# Altium PCB BaseBoard.PcbDoc
Units mm, origin at the board's own origin, x right, y up, seen from the top; angles counter-clockwise.
Board outline 52.58 x 52.07 mm, 2 copper layers (Top Layer, Bottom Layer); 62 components, 47 nets, 274 pads, 37 vias.
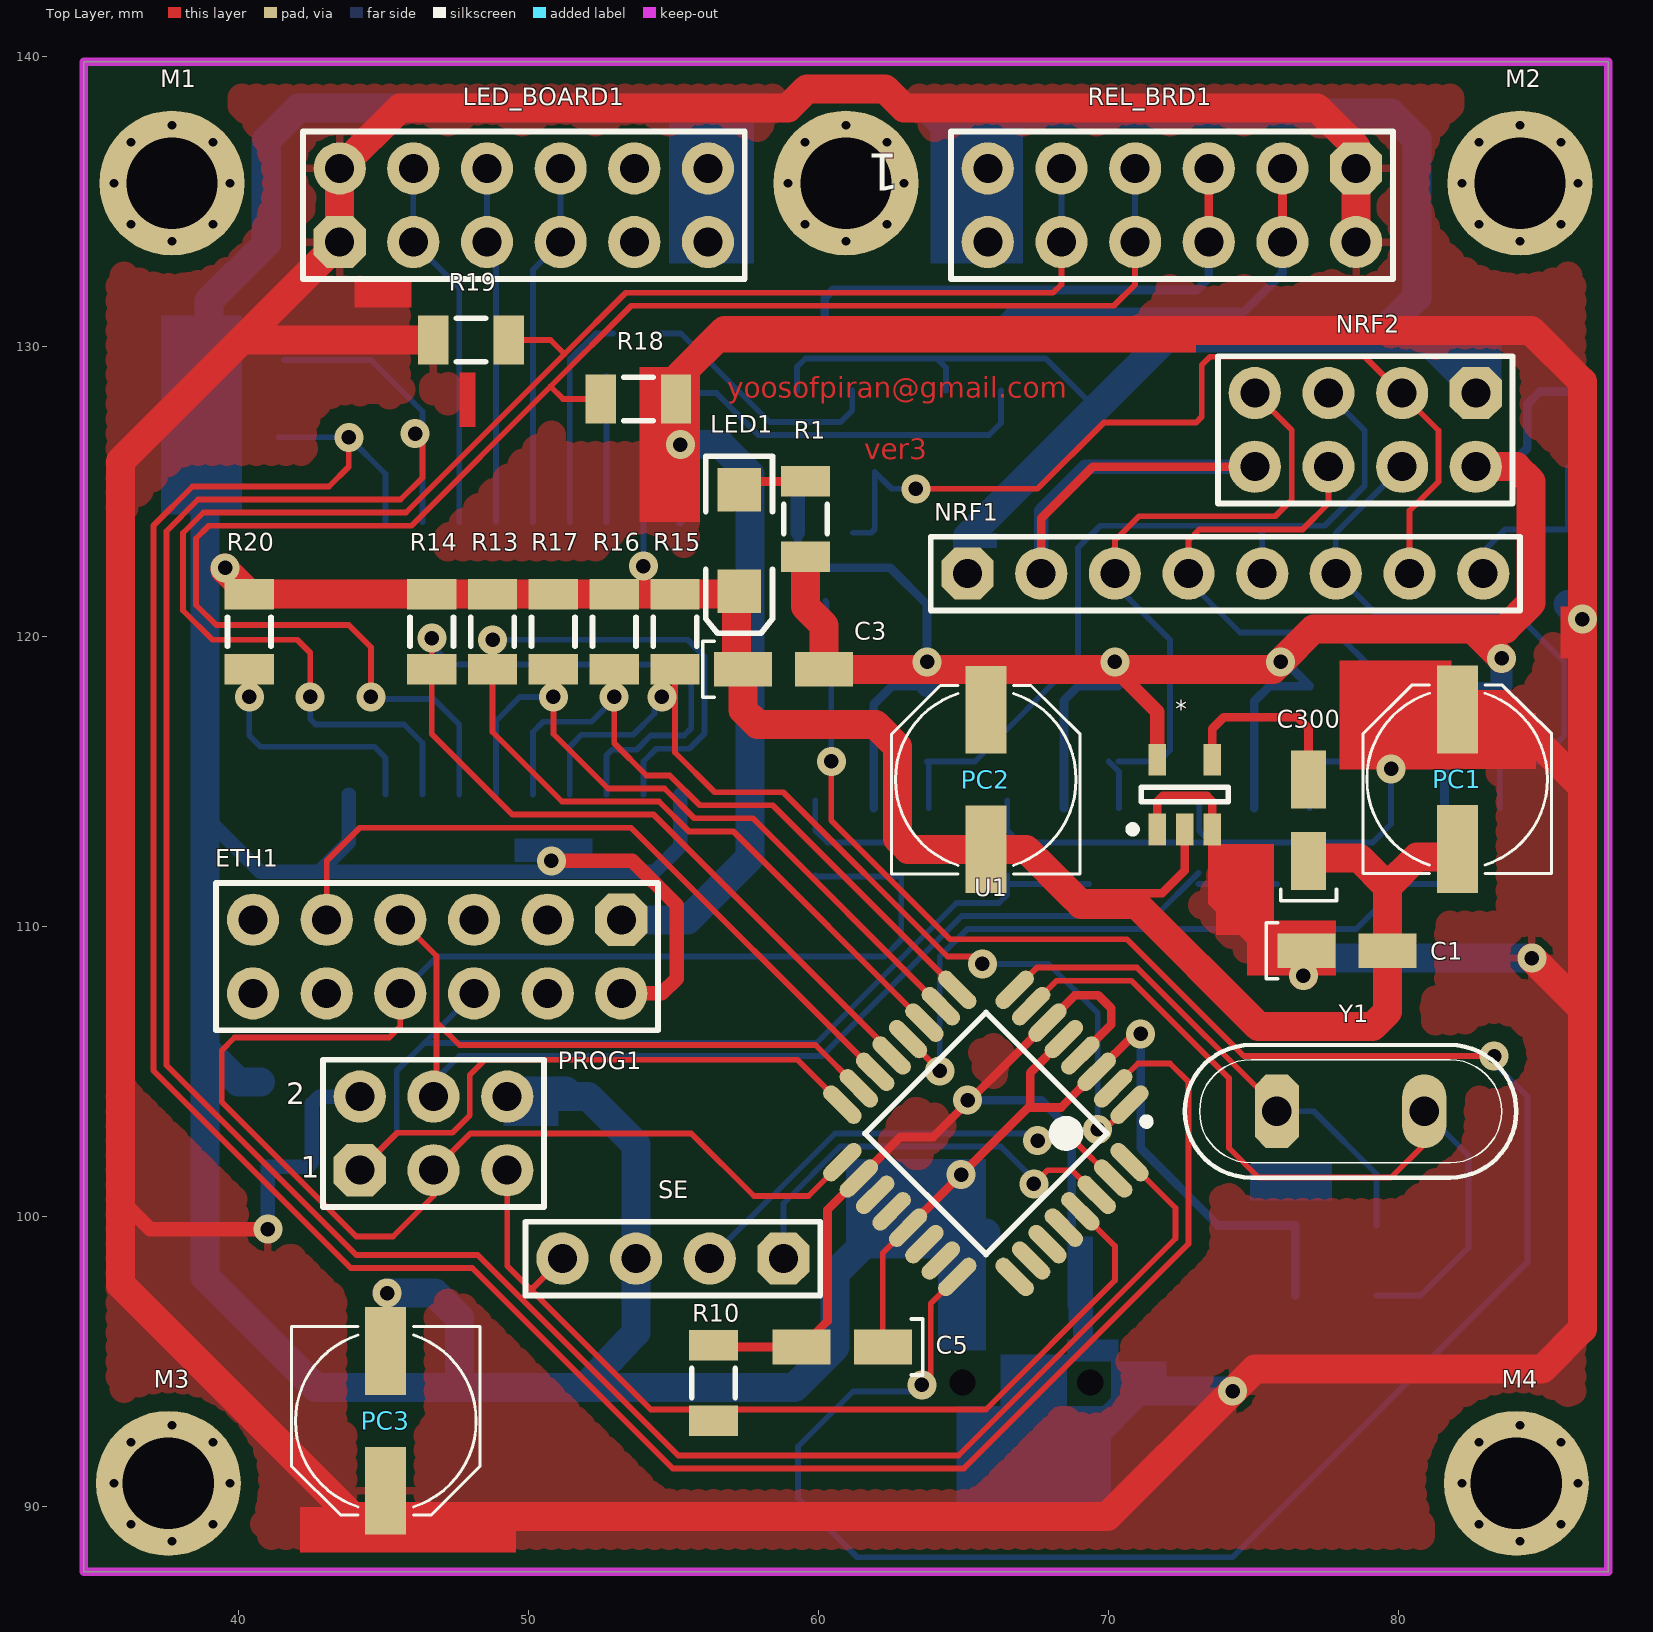
[diagram p0: Top Layer view]
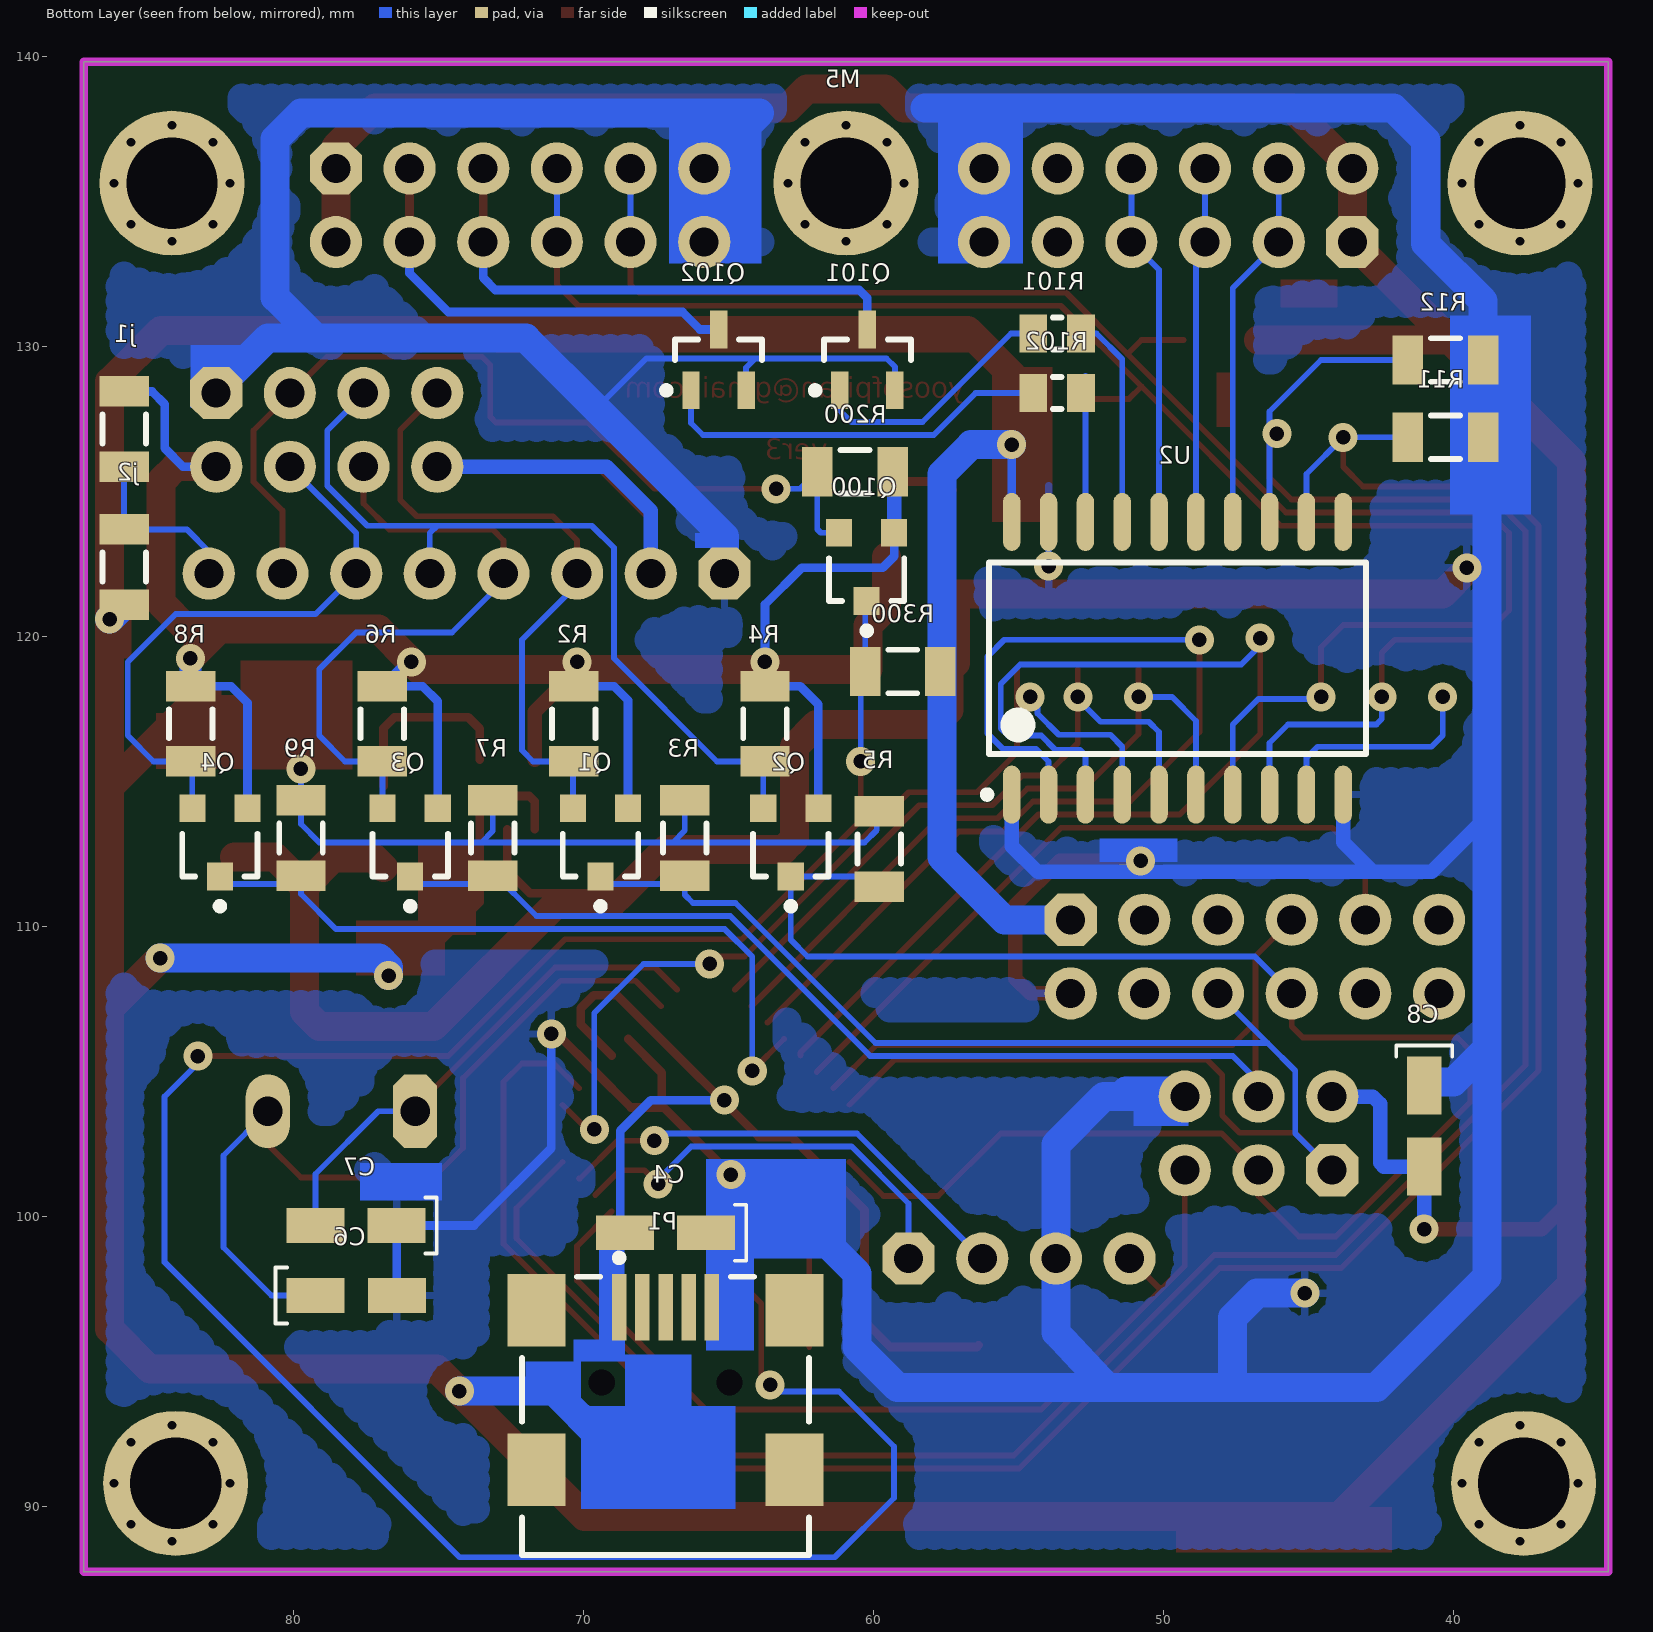
[diagram p1: Bottom Layer view, seen from below]
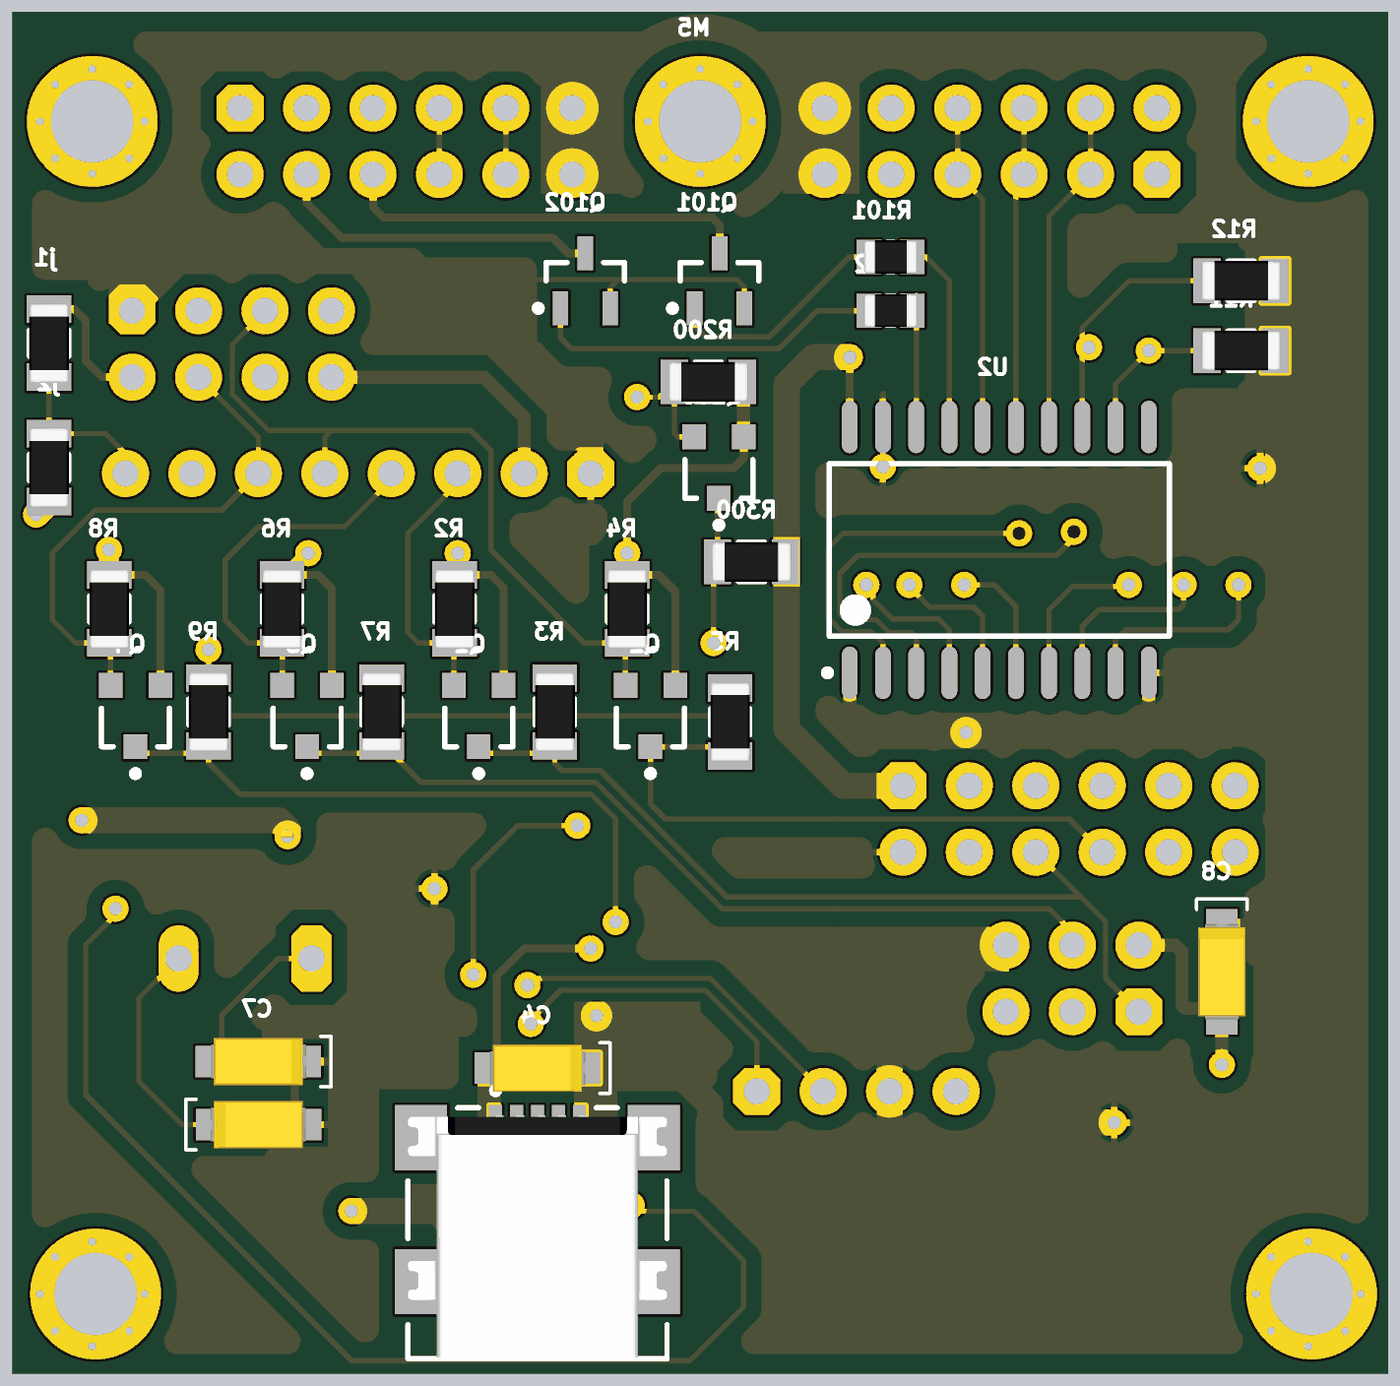
[diagram p2: 3D render of the assembled board from below, using the file's embedded part models]

## Layer stack, top to bottom
Top Solder: solder mask 0.0102, Solder Resist, Dk 3.5
Top Layer: signal copper 0.0356
Dielectric 1: dielectric 0.32, FR-4, Dk 4.8
Bottom Layer: signal copper 0.0356
Bottom Solder: solder mask 0.0102, Solder Resist, Dk 3.5

## Board outline
34.671,87.757 34.671,139.827 87.249,139.827 87.249,87.757

## Design rules (kind name [scope] priority, off if disabled: settings)
Clearance Clearance_1 [InPolygon] p1: gap=0.6
Clearance [All] p2: gap=0.25
PolygonConnect [All] p1: connectstyle=Relief reliefconductorwidth=0.254 reliefentries=4 polygonreliefangle="90 Angle" airgapwidth=0.254
RoutingVias [All] p1: holewidth=0.5 width=1 viastyle="Through Hole" minholewidth=0.5 minwidth=1 maxholewidth=0.711 maxwidth=1.27
SolderMaskExpansion [All] p1: expansion=0.102
Width Width_1 [(InNet('3.3V') AND InNet('VCC') AND InNet('GND'))] p1: maxlimit=5 minlimit=0.5 preferedwidth=1
Width [All] p2: maxlimit=5 minlimit=0.2 preferedwidth=0.2
30 further rules are at their usual default settings.

## Components (designator, comment, footprint, x,y, rotation, side; value= is the part's Value field where it differs from the comment)
* "Component_1" mic5205 72.644,114.554 r90 top
C1 "47uF" "CAPP 1206 (3216X18L) Size A" 76.835,109.169 r0 top
C3 "100nF" "CAPP 1206 (3216X18L) Size A" 57.404,118.872 r0 top
C4 "100nF" "CAPP 1206 (3216X18L) Size A" 65.786,99.441 r0 bottom
C5 "100nF" "CAPP 1206 (3216X18L) Size A" 62.23,95.504 r180 top
C6 "22pF" "CAPP 1206 (3216X18L) Size A" 79.248,97.282 r180 bottom
C7 "22pF" "CAPP 1206 (3216X18L) Size A" 76.454,99.695 r0 bottom
C8 "100nF" "CAPP 1206 (3216X18L) Size A" 41.021,104.521 r270 bottom
C300 "100nF" "CAPP 1206 (3216X18L) Size A" 76.911,112.268 r90 top
ETH1 "Header 6X2" HDR2X6 53.213,110.236 r180 top
j1 "10K" "RES 1206 (3216X08L)" 85.852,125.857 r90 bottom
j2 "10K" "RES 1206 (3216X08L)" 85.852,123.698 r270 bottom
LED1 "Red" "LED SMD 1206" 57.277,123.317 r270 top
LED_BOARD1 "Header 6X2" HDR2X6 43.5,133.604 r0 top
M1 "Screw" "Board Screw_No Silk"#1 37.719,135.636 r0 top
M2 "Screw" "Board Screw_No Silk"#1 84.201,135.636 r0 top
M3 "Screw" "Board Screw_No Silk"#2 37.719,90.805 r0 top
M4 "Screw" "Board Screw_No Silk"#2 84.201,90.805 r0 top
M5 "Screw" "Board Screw_No Silk"#1 60.96,135.636 r180 bottom (schematic designator M1)
NRF1 "Header 8" HDR1X8 65.151,122.174 r0 top
NRF2 "Header 4X2" HDR2X4 82.677,128.397 r180 top
P1 "USB mini" USB/SM0.8-6H5 67.183,89.027 r270 bottom
PC1 "47u" PANASONIC_D 82.042,115.075 r90 top
PC2 "47u" PANASONIC_D 65.786,115.062 r90 top (schematic designator PC1)
PC3 "47u" PANASONIC_D 45.085,92.964 r270 top (schematic designator PC1)
PROG1 "Header 3X2" HDR2X3 44.196,101.6 r0 top
Q1 "BSS138" SOT23 69.427,112.903 r0 bottom
Q2 "BSS138" SOT23 62.865,112.903 r0 bottom
Q3 "BSS138" SOT23 75.988,112.903 r0 bottom
Q4 "BSS138" SOT23 82.55,112.903 r0 bottom
Q100 "BSS138" SOT23 60.249,122.403 r0 bottom
Q101 "MMBT2222A" SOT23_N 60.223,129.54 r90 bottom
Q102 "MMBT2222A" SOT23_N 65.354,129.54 r90 bottom
R1 "470" "RES 1206 (3216X08L)" 59.563,125.349 r270 top
R2 "10K" "RES 1206 (3216X08L)" 70.353,115.697 r90 bottom
R3 "10K" "RES 1206 (3216X08L)" 66.52,111.76 r90 bottom
R4 "10K" "RES 1206 (3216X08L)" 63.754,115.697 r90 bottom
R5 "10K" "RES 1206 (3216X08L)" 59.817,111.379 r90 bottom
R6 "10K" "RES 1206 (3216X08L)" 76.951,115.697 r90 bottom
R7 "10K" "RES 1206 (3216X08L)" 73.138,111.76 r90 bottom
R8 "10K" "RES 1206 (3216X08L)" 83.55,115.697 r90 bottom
R9 "10K" "RES 1206 (3216X08L)" 79.756,111.76 r90 bottom
R10 "10K" "RES 1206 (3216X08L)" 56.388,92.964 r90 top
R11 "10K" "RES 1206 (3216X08L)" 38.989,126.873 r0 bottom
R12 "10K" "RES 1206 (3216X08L)" 38.989,129.54 r0 bottom
R13 "10K" "RES 1206 (3216X08L)" 48.773,118.872 r90 top
R14 "10K" "RES 1206 (3216X08L)" 46.676,118.872 r90 top
R15 "10K" "RES 1206 (3216X08L)" 55.064,118.872 r90 top
R16 "10K" "RES 1206 (3216X08L)" 52.967,118.872 r90 top
R17 "10K" "RES 1206 (3216X08L)" 50.87,118.872 r90 top
R18 "10K" "RES 1206 (3216X08L)" 52.502,128.194 r0 top
R19 "10K" "RES 1206 (3216X08L)" 49.327,130.226 r180 top
R20 "10K" "RES 1206 (3216X08L)" 40.386,118.872 r90 top
R101 "1K" "RES 0805 (2012X06L)" 52.857,130.454 r0 bottom
R102 "1K" "RES 0805 (2012X06L)" 52.857,128.397 r0 bottom
R200 "10K" "RES 1206 (3216X08L)" 61.951,125.679 r180 bottom
R300 "10K" "RES 1206 (3216X08L)" 60.3,118.796 r180 bottom
REL_BRD1 "Header 6X2" HDR2X6 78.55,136.144 r180 top
SE "Header 4" HDR1X4 58.801,98.552 r180 top
U1 "ATmega328-AU" 32A_N 65.786,102.87 r225 top
U2 "MC74HC541DW" 751D-03_N 49.53,119.253 r90 bottom
Y1 "CRYSTAL" My_Crystal 78.359,103.632 r0 top

## Footprints (in the part's own frame and the unit in brackets; to place one, negate y for a bottom-side part, rotate by r counter-clockwise, add the part's x,y. Pads: shape width x height; smd on the part's side, far side on the other; paste and mask are expansions set on the pad)
32A_N [mm] "Thin QFP, 32-Leads, Body 7x7mm, Pitch 0.8mm, IPC Medium Density"
  oval 1.65x0.55 smd: 1(-4.2,2.8) 2(-4.2,2) 3(-4.2,1.2) 4(-4.2,0.4) 5(-4.2,-0.4) 6(-4.2,-1.2) 7(-4.2,-2) 8(-4.2,-2.8) 17(4.2,-2.8) 18(4.2,-2) 19(4.2,-1.2) 20(4.2,-0.4) 21(4.2,0.4) 22(4.2,1.2) 23(4.2,2) 24(4.2,2.8)
  oval 0.55x1.65 smd: 9(-2.8,-4.2) 10(-2,-4.2) 11(-1.2,-4.2) 12(-0.4,-4.2) 13(0.4,-4.2) 14(1.2,-4.2) 15(2,-4.2) 16(2.8,-4.2) 25(2.8,4.2) 26(2,4.2) 27(1.2,4.2) 28(0.4,4.2) 29(-0.4,4.2) 30(-1.2,4.2) 31(-2,4.2) 32(-2.8,4.2)
  silkscreen extent -4.32,-2.95 2.95,3.75, body extent -3.5,-3.5 3.5,3.5, height 1.2
751D-03_N [mm] "SOIC, 20-Leads, Body 12.8x7.5mm, Pitch 1.27mm, IPC Medium Density"
  oval 2x0.6 smd: 1(-4.7,5.715) 2(-4.7,4.445) 3(-4.7,3.175) 4(-4.7,1.905) 5(-4.7,0.635) 6(-4.7,-0.635) 7(-4.7,-1.905) 8(-4.7,-3.175) 9(-4.7,-4.445) 10(-4.7,-5.715) 11(4.7,-5.715) 12(4.7,-4.445) 13(4.7,-3.175) 14(4.7,-1.905) 15(4.7,-0.635) 16(4.7,0.635) 17(4.7,1.905) 18(4.7,3.175) 19(4.7,4.445) 20(4.7,5.715)
  silkscreen extent -4.82,-6.5 3.3,6.69, body extent -3.8,-6.5 3.8,6.5, height 2.65
"Board Screw_No Silk"#1 [mm]
  round 0.6 hole 0.3: S(-2,0) S(-1.414,-1.414) S(-1.414,1.414) S(0,-2) S(0,2) S(1.414,-1.414) S(1.414,1.414) S(2,0)
  round 5 hole 3.15 mask+0.1: S(0,0)
"Board Screw_No Silk"#2 [mm]
  round 0.6 hole 0.3: S(-2,0) S(-1.414,-1.414) S(-1.414,1.414) S(0,-2) S(0,2) S(1.414,-1.414) S(1.414,1.414) S(2,0)
  round 5 hole 3.15 mask+0.1: S(-0.127,0)
"CAPP 1206 (3216X18L) Size A" [mm] "Chip Capacitor, 2-Leads, Body 3.2x1.6mm, IPC High Density, chip Tantalum"
  rect 1.999x1.199 smd: 1(0,0) 2(2.8,0)
  silkscreen extent -1.38,-0.97 -0.99,0.97, body extent -0.43,-0.9 3.21,0.9, height 1.8
HDR1X4 [mm]
  oct 1.8x1.8 hole 1: 1(0,0)
  round 1.8 hole 1: 2(2.54,0) 3(5.08,0) 4(7.62,0)
  silkscreen extent -1.27,-1.27 8.89,1.27
HDR1X8 [mm]
  oct 1.8x1.8 hole 1: 1(0,0)
  round 1.8 hole 1: 2(2.54,0) 3(5.08,0) 4(7.62,0) 5(10.16,0) 6(12.7,0) 7(15.24,0) 8(17.78,0)
  silkscreen extent -1.27,-1.27 19.05,1.27
HDR2X3 [mm]
  oct 1.8x1.8 hole 1: 1(0,0)
  round 1.8 hole 1: 2(0,2.54) 3(2.54,0) 4(2.54,2.54) 5(5.08,0) 6(5.08,2.54)
  silkscreen extent -1.27,-1.27 6.35,3.81
HDR2X4 [mm]
  oct 1.8x1.8 hole 1: 1(0,0)
  round 1.8 hole 1: 2(0,2.54) 3(2.54,0) 4(2.54,2.54) 5(5.08,0) 6(5.08,2.54) 7(7.62,0) 8(7.62,2.54)
  silkscreen extent -1.27,-1.27 8.89,3.81
HDR2X6 [mm]
  oct 1.8x1.8 hole 1: 1(0,0)
  round 1.8 hole 1: 2(0,2.54) 3(2.54,0) 4(2.54,2.54) 5(5.08,0) 6(5.08,2.54) 7(7.62,0) 8(7.62,2.54) 9(10.16,0) 10(10.16,2.54) 11(12.7,0) 12(12.7,2.54)
  silkscreen extent -1.27,-1.27 13.97,3.81
"LED SMD 1206" [mm]
  rect 1.5x1.5 smd: 1(-1.75,0) 2(1.75,0)
  silkscreen extent -2.9,-1.15 3.2,1.15, body extent -1.65,-0.76 1.65,0.69, height 1.36
mic5205 [mm] "SOT23, 5-Leads, Body 2.91x2.80mm, Pitch 0.95mm, IPC Medium Density"
  rect 1.1x0.6 smd: 1(-1.2,0.95) 2(-1.2,0) 3(-1.2,-0.95) 4(1.2,-0.95) 5(1.2,0.95)
  silkscreen extent -1.32,-1.5 0.25,1.92, body extent -0.87,-1.51 0.87,1.51, height 1.3
My_Crystal [mil]
  oct 60x100 hole 40: 1(-100,0)
  oval 60x100 hole 40: 2(100,0)
  silkscreen extent -225,-90 225,90
PANASONIC_D [mil] "PANASONIC_D"
  rect 119x56 smd: +(95,0) -(-94.49,0)
  silkscreen extent -128,-128 128,128
"RES 0805 (2012X06L)" [mm] "Chip Resistor, 2-Leads, Body 2.0x1.3mm, IPC High Density _ (0.100 W)"
  rect 0.95x1.3 smd: 1(0,0) 2(1.65,0)
  silkscreen extent 0.67,-0.55 0.97,0.55, body extent -0.19,-0.63 1.84,0.64, height 0.6
"RES 1206 (3216X08L)" [mm] "Chip Resistor, 2-Leads, Body 3.2x1.6mm, IPC High Density _ (0.125 W)"
  rect 1.05x1.7 smd: 1(0,0) 2(2.596,0)
  silkscreen extent 0.8,-0.75 1.8,0.75, body extent -0.23,-0.76 2.82,0.76, height 0.6
SOT23 [mm] "SOT-23; 3 Leads; Body 3.1 x 2.5 mm, inc. leads (LxW max), Alternate Lead Configuration"
  rect 0.9x0.95 smd: 1(0,1.175) 2(0.95,-1.175) 3(-0.95,-1.175)
  silkscreen extent -1.3,-0.3 1.3,2.32
SOT23_N [mm] "SOT23, 3-Leads, Body 2.9x1.3mm, Pitch 0.95mm, Lead Span 2.3mm, IPC Medium Density"
  rect 1.3x0.6 smd: 1(-1.05,0.95) 2(-1.05,-0.95) 3(1.05,0)
  silkscreen extent -1.17,-1.5 0.7,1.93, body extent -0.7,-1.5 0.7,1.5, height 1.1
USB/SM0.8-6H5 [mm] "Connector; USB2.0, Type B, SM; 5 Position; Right Angle"
  rect 2.3x0.5 smd: 1(-7.85,-1.6) 2(-7.85,-0.8) 3(-7.85,0) 4(-7.85,0.8) 5(-7.85,1.6)
  rect 2.5x2 smd: 6(-7.75,4.45) 7(-2.25,4.45) 8(-7.75,-4.45) 9(-2.25,-4.45)
  round 0.6 hole 0.9 unplated: MH1(-5.25,2.2) MH2(-5.25,-2.2)
  silkscreen extent -9.67,-4.95 0.7,4.95, body extent -8.6,-4.95 0.65,4.95, height 3.93

## Part data
C1: library part Cap-Polar, "Polar Capacitor"
C3 C4 C5 C6 C7 C8 C300: library part Cap-Bipolar, "Bipolar Capacitor"
ETH1 LED_BOARD1 REL_BRD1: "Header, 6-Pin, Dual row"
j1 j2 R1 R2 R3 R4 R5 R6 R7 R8 R9 R10 R11 R12 R13 R14 R15 R16 R17 R18 R19 R20 R101 R102 R200 R300: library part Resistor, "Resistor"
LED1: library part LED, "LED"
M1 M2 M3 M4 M5: library part "Board Screw", "Board Screw With Spacer"
NRF1: "Header, 8-Pin"
NRF2: "Header, 4-Pin, Dual row"
P1: "mini USB Connector"
PC1 PC2 PC3: library part PANASONIC_D
PROG1: "Header, 3-Pin, Dual row"
Q1 Q2 Q3 Q4 Q100: "N-Channel Enhancement Mode Vertical DMOS FET"
Q101 Q102: "NPN Switching Transistor"
SE: "Header, 4-Pin"
U1: "8-bit AVR Microcontroller, 32KB Flash, 1KB EEPROM, 2KB SRAM, 32-pin TQFP, Industrial Grade (-40°C to 85°C)"
U2: "Octal 3-State Non-Inverting Buffer/Line Driver/Line Receiver"
Y1: "Crystal"

## Via types
v1: diameter 1, hole 0.5, Top Layer to Bottom Layer, 37 vias

## Nets (pads, with @x,y where several pads share a name; then routed paths per layer and width w, separated by ;. In a path a pad name is that pad's centre, name@x,y a point inside that pad or via, vN(x,y) a via of type N, cw(c..) or ccw(c..) an arc to the next point about the centre after c; other vN are vias at no path point)
3.3V: *.5 C3.2 j1.2 NRF2.2 PC2.+ Q1.3 Q2.3 Q3.3 Q4.3 Q100.3 R1.2 R2.2 R4.2 R6.2 R8.2 R200.2 | length 82.4
  Top Layer w0.5: v1@70.231,118.872 71.694,117.409 *.5
  Top Layer w1: R1.2 59.563,121.031 60.204,120.39 C3.2 70.231,118.872 75.692,118.872 v1(75.946,119.126) 77.089,120.269 82.55,120.269 ; NRF2.2 84.074,125.857 84.582,125.349 84.582,121.158 83.693,120.269 82.55,120.269 ; v1(83.566,119.253) 82.55,120.269
  Bottom Layer w0.3: Q100.3 59.299,122.768 59.69,122.377 62.484,122.377 63.754,121.107 v1(63.754,119.126) ; Q2.3 61.915,117.668 62.54,118.293 R4.2 ; Q1.3 68.477,117.809 68.961,118.293 R2.2 ; Q3.3 75.038,117.766 75.565,118.293 R6.2 76.073,119.171 75.991,119.171 v1(75.946,119.126) ; Q4.3 81.6,117.724 82.169,118.293 R8.2 ; NRF2.2 83.82,125.857 84.455,126.492 84.455,128.016 84.892,128.453 j1.2
  Bottom Layer w0.5: Q100.3 R200.2@59.299,125.623
  Bottom Layer w0.75: R4.2 v1(63.754,119.126) ; R8.2 83.566,118.309 v1(83.566,119.253)
  other v1: 70.231,119.126
A0: U1.23
A1: Q100.1 R300.1 U1.24 | length 82.6
  Top Layer w0.2: v1(60.452,115.697) 60.452,113.66 64.55,109.562 70.654,109.562 74.679,105.537 v1(83.312,105.537) ; v1@63.558,94.107 63.581,94.13 v1(63.581,94.195) ; v1@63.881,94.43 63.881,97.005 U1.24
  Bottom Layer w0.2: Q100.1 60.3,121.177 R300.1 ; v1(60.452,115.697) R300.1@60.452,118.796 ; v1(63.581,94.195) 63.581,93.968 61.202,93.968 59.309,92.075 59.309,90.297 61.349,88.257 74.287,88.257 84.455,98.425 84.455,104.14 83.312,105.283 v1(83.312,105.537)
A2: U1.25
A3: U1.26
A4: U1.27
A5: U1.28
BPWM: LED_BOARD1.3 LED_BOARD1.4 U2.14 | length 12.8
  Bottom Layer w0.2: LED_BOARD1.4 LED_BOARD1.3 47.625,132.019 U2.14
CE1NRF: NRF1.7 NRF2.3 Q100.2 R200.1 | length 31.8
  Top Layer w0.2: v1(63.373,125.095) 67.564,125.095 69.847,127.378 73.025,127.378 73.23,127.583 73.23,129.364 73.513,129.647 78.847,129.647 81.387,127.107 81.387,125.339 80.391,124.343 NRF1.7
  Bottom Layer w0.2: Q100.2 61.83,123.578 61.951,123.698 R200.1 62.535,125.095 v1(63.373,125.095)
CS_ETH: ETH1.9 U1.14 | length 24.9
  Top Layer w0.2: ETH1.9 43.053,112.268 44.196,113.411 53.548,113.411 U1.14
CSN1NRF: NRF1.6 NRF2.4 Q4.2 R8.1 | length 20.7
  Bottom Layer w0.2: NRF2.4 80.137,125.856 77.851,123.57 NRF1.6 79.248,120.777 84.074,120.777 85.725,119.126 85.725,116.586 84.836,115.697 R8.1 83.5,115.647 Q4.2 ; NRF2.4@80.899,125.857 NRF2.4@80.899,126.111
GND: *.2 C1.2 C3.1 C4.1 C5.1 C6.2 C7.1 C8.1 C300.1 ETH1.2 LED1.2 LED_BOARD1.11 LED_BOARD1.12 NRF1.1 NRF2.1 P1.5 PC1.- PC2.- PC3.- PROG1.6 Q101.2 Q102.2 R11.1 R12.1 R13.2 R14.2 R15.2 R16.2 R17.2 R20.2 REL_BRD1.11 REL_BRD1.12 SE.3 U1.3 U1.5 U1.21 U2.1 U2.10 U2.19 | length 319.4
  Top Layer w0.2: 53.975,121.595 v1(53.975,122.428) ; C5.1 62.23,98.748 U1.21
  Top Layer w0.3: U1.21 v1(64.926,101.444) 67.275,103.794 ; U1.5 67.31,104.96 67.31,103.759 68.372,103.759 U1.3 70.912,106.299 v1(71.12,106.299) ; 68.682,111.15 71.857,111.15 72.644,111.938 *.2
  Top Layer w0.5: v1(50.8,112.268) 53.594,112.268 55.118,110.744 55.118,108.204 54.61,107.696 ETH1.2
  Top Layer w1: v1(39.553,122.372) 39.553,122.301 R20.2 42.483,121.468 44.58,121.468 R14.2 R13.2 R17.2 R16.2 R15.2 57.178,121.468 57.178,119.098 C3.1 57.404,117.475 57.912,116.967 61.976,116.967 62.738,116.205 62.738,113.03 63.106,112.662 PC2.- 67.17,112.662 68.682,111.15 69.067,110.765 70.972,110.765 75.184,106.553 79.121,106.553 79.635,107.067 C1.2 79.635,111.385 ; C300.1@76.911,112.039 77.241,112.37 78.65,112.37 79.635,111.385 ; PC1.-@82.042,112.395 80.645,112.395 79.635,111.385
  Bottom Layer w0.2: v1(53.975,122.428) U2.19 ; Q101.2 59.273,129.301 59.562,129.59 60.668,129.59 ; 60.669,129.591 64.414,129.591 ; Q102.2 64.404,129.27 64.084,129.59 67.844,129.59 69.571,127.864
  Bottom Layer w0.3: v1(64.926,101.444) 65.583,100.787 65.583,99.441 P1.5 ; v1(71.12,106.299) 71.12,102.362 73.787,99.695 C7.1 ; C6.2 C7.1@76.448,99.689
  Bottom Layer w0.5: 38.863,113.792 40.768,111.887 42.799,111.887 ; U2.10 43.815,112.903 42.799,111.887 ; U2.1 55.245,112.776 54.356,111.887 42.799,111.887
  Bottom Layer w1: C8.1@40.767,104.648 40.005,104.648 38.863,105.79 ; v1(45.136,97.358) 46.787,97.358 47.625,96.52 47.625,94.107 ; 51.308,104.337 49.473,104.337 PROG1.6 52.07,104.14 53.721,102.489 SE.3 53.721,96.012 51.943,94.107 ; LED_BOARD1.11 LED_BOARD1.12 LED_BOARD1.12@56.504,136.144 ; 58.232,138.228 42.089,138.228 40.969,137.108 40.969,133.552 38.989,131.572 R12.1 R11.1 38.863,126.747 38.863,113.792 38.863,105.79 ; NRF1.1 65.151,123.444 69.571,127.864 71.998,130.291 79.237,130.291 79.248,130.302 ; C4.1 65.583,99.441 61.976,99.441 60.579,98.044 60.579,95.504 59.182,94.107 51.943,94.107 ; REL_BRD1.12 REL_BRD1.11 63.945,138.049 79.756,138.049 80.645,137.16 80.645,131.699 79.248,130.302 ; NRF2.1@82.55,128.651 80.899,130.302 79.248,130.302 ; 38.863,105.79 38.863,97.916 42.672,94.107 47.625,94.107 ; 47.625,94.107 51.943,94.107
GPWM: LED_BOARD1.5 LED_BOARD1.6 U2.15 | length 12.3
  Bottom Layer w0.2: LED_BOARD1.6 LED_BOARD1.5 48.895,133.289 U2.15
IN_1: R18.1 REL_BRD1.7 REL_BRD1.8 U2.7 | length 58.4
  Top Layer w0.2: v1@44.58,117.853 44.58,119.631 43.815,120.396 39.244,120.396 38.55,121.09 38.55,123.386 38.989,123.825 45.974,123.825 50.775,128.626 ; R18.1 51.206,128.194 50.775,128.626 ; REL_BRD1.8 70.93,132.144 70.192,131.406 53.555,131.406 50.775,128.626
  Bottom Layer w0.2: v1@44.58,117.853 46.739,117.853 47.625,116.967 U2.7 ; REL_BRD1.8 REL_BRD1.7
  other v1: 44.58,117.918
IN_2: R19.1 REL_BRD1.9 REL_BRD1.10 U2.8 | length 55.9
  Top Layer w0.2: v1(42.483,117.918) 42.483,119.442 42.037,119.888 39.116,119.888 38.1,120.904 38.1,123.572 38.803,124.275 45.788,124.275 51.257,129.744 ; R19.1 50.775,130.226 51.257,129.744 ; REL_BRD1.10 68.39,132.144 68.102,131.856 53.369,131.856 51.257,129.744
  Bottom Layer w0.2: v1(42.483,117.918) 42.483,117.156 42.672,116.967 45.72,116.967 46.355,116.332 U2.8 ; REL_BRD1.10 REL_BRD1.9
IO0: SE.1 U1.30 | length 14.7
  Top Layer w0.2: v1(67.437,101.131) 67.906,101.6 68.753,101.6 U1.30
  Bottom Layer w0.2: SE.1 58.801,100.456 60.765,102.42 66.294,102.42 67.437,101.277 v1(67.437,101.131)
IO1: SE.2 U1.31 | length 16.3
  Top Layer w0.2: v1(67.564,102.616) 68.834,102.616 70.135,101.314 U1.31
  Bottom Layer w0.2: SE.2 60.579,102.87 67.31,102.87 v1(67.564,102.616)
IO2: R12.2 U1.32 U2.13 | length 85.7
  Top Layer w0.2: v1(46.101,127) 46.355,126.746 46.355,125.479 45.601,124.725 38.616,124.725 37.526,123.635 37.526,105.221 44.069,98.678 48.26,98.678 55.175,91.763 64.838,91.763 72.321,99.246 72.321,100.295 U1.32
  Bottom Layer w0.2: R12.2 44.577,129.54 46.355,127.762 U2.13
IO3: R15.1 U1.1 U2.4 | length 32.2
  Top Layer w0.2: R15.1 55.064,116.005 56.435,114.634 58.794,114.634 64.462,108.966 65.405,108.966 v1(65.659,108.712) ; v1(69.64,103.012) 69.888,103.012 U1.1
  Bottom Layer w0.2: U2.4 51.435,116.205 51.843,116.613 53.621,116.613 54.356,117.348 v1@54.356,117.856 ; v1(65.659,108.712) 67.945,108.712 69.64,107.017 v1(69.64,103.012)
  other v1: 54.61,117.918
IO4: R11.2 U1.2 U2.12 | length 86.6
  Top Layer w0.2: v1(43.815,126.873) 43.815,125.857 43.133,125.175 38.43,125.175 37.076,123.821 37.076,105.034 43.883,98.228 48.074,98.228 54.988,91.313 65.024,91.313 72.771,99.06 72.771,104.648 72.136,105.283 71.027,105.283 U1.2
  Bottom Layer w0.2: R11.2@41.402,126.873 v1(43.815,126.873) 45.085,125.603 U2.12
IO5: R16.1 U1.9 U2.5 | length 23.3
  Top Layer w0.2: R16.1 52.967,116.324 54.08,115.211 54.886,115.211 55.913,114.184 58.432,114.184 U1.9
  Bottom Layer w0.2: U2.5 50.165,116.71 50.518,117.063 52.182,117.063 v1@52.967,117.848
  other v1: 52.967,117.918
IO6: R17.1 U1.10 U2.6 | length 24.3
  Top Layer w0.2: R17.1 50.87,116.643 52.752,114.761 54.7,114.761 55.727,113.734 57.75,113.734 U1.10
  Bottom Layer w0.2: U2.6 48.895,117.094 49.714,117.913 v1@50.87,117.913
  other v1: 50.87,117.918
IO7: R13.1 U1.11 U2.2 | length 36.3
  Top Layer w0.2: v1@48.773,120.137 v1(48.773,119.888) R13.1 48.773,116.708 51.17,114.311 54.513,114.311 55.54,113.284 57.069,113.284 U1.11
  Bottom Layer w0.2: v1(48.773,119.888) 55.5,119.888 56.076,119.312 56.076,116.654 55.558,116.136 54.417,116.136 53.975,115.694 U2.2
IO8: Q4.1 R9.1 U1.12 | length 25.4
  Top Layer w0.2: U1.12 v1(64.193,105.029)
  Bottom Layer w0.2: v1(64.193,105.029) 64.193,108.966 65.14,109.913 78.544,109.913 79.756,111.125 R9.1 ; R9.1@79.756,111.506 79.788,111.474 Q4.1@82.55,111.474
IO9: R14.1 U1.13 U2.3 | length 39.8
  Top Layer w0.2: v1(46.676,119.948) R14.1 46.676,116.646 49.461,113.861 54.327,113.861 62.533,105.654 U1.13
  Bottom Layer w0.2: v1(46.676,119.948) 46.676,119.694 47.332,119.038 54.952,119.038 55.626,118.364 55.626,116.84 55.372,116.586 54.23,116.586 53.742,116.097 52.893,116.097 52.705,115.909 U2.3
IO11: ETH1.7 PROG1.4 Q3.1 R7.1 U1.15 | length 54.7
  Top Layer w0.2: ETH1.7 46.843,108.986 46.843,106.705 ; PROG1.4 46.843,104.247 46.843,106.705 ; U1.15 59.91,105.918 47.63,105.918 46.843,106.705
  Bottom Layer w0.2: PROG1.4 46.736,104.648 47.625,105.537 60.127,105.537 64.953,110.363 71.628,110.363 R7.1@73.12,111.855 ; R7.1@73.12,111.474 Q3.1@75.819,111.474
IO12: ETH1.6 PROG1.1 Q1.1 R3.1 U1.16 | length 53.1
  Top Layer w0.2: PROG1.1 45.486,102.89 47.391,102.89 47.986,103.485 47.986,104.882 48.514,105.41 59.286,105.41 U1.16
  Bottom Layer w0.2: PROG1.1 45.466,102.87 45.466,105.029 46.424,105.987 ; ETH1.6 46.424,105.987 ; R3.1 66.52,111.097 66.239,110.816 64.77,110.816 59.941,105.987 46.424,105.987 ; R3.1@66.548,111.506 66.58,111.474 Q1.1@69.342,111.474
IO13: ETH1.8 PROG1.3 Q2.1 R5.1 U1.17 | length 59.3
  Top Layer w0.2: ETH1.8 45.593,106.553 45.212,106.172 39.878,106.172 39.433,105.727 39.433,103.95 44.069,99.314 45.339,99.314 46.736,100.711 PROG1.3 46.737,101.6 48.007,102.87 55.626,102.87 57.785,100.711 59.667,100.711 U1.17
  Bottom Layer w0.2: ETH1.8 46.863,108.966 62.284,108.966 62.865,109.547 Q2.1 59.934,111.728 R5.1@59.902,111.76
IRQ1NRF: NRF1.2 NRF2.8 | length 20.2
  Top Layer w0.3: NRF1.2 67.691,124.079 69.469,125.857 NRF2.8
  Bottom Layer w0.5: NRF1.2 67.691,124.333 69.215,125.857 NRF2.8
MISO1NRF: NRF1.3 NRF2.7 Q1.2 R2.1 | length 22.6
  Top Layer w0.2: NRF1.3 70.231,123.317 71.062,124.148 75.761,124.148 76.327,124.714 76.327,127.127 NRF2.7
  Bottom Layer w0.2: R2.1@70.019,115.697 70.377,115.34 Q1.2 ; NRF1.3 70.231,121.793 72.136,119.888 72.136,116.078 71.755,115.697 R2.1
MOSI1NRF: NRF1.4 NRF2.6 Q3.2 R6.1 | length 22.1
  Top Layer w0.2: NRF1.4 72.771,123.317 73.152,123.698 76.708,123.698 77.597,124.587 NRF2.6
  Bottom Layer w0.2: NRF1.4 72.771,121.92 74.549,120.142 77.851,120.142 79.121,118.872 79.121,116.586 78.232,115.697 R6.1 76.938,115.684 Q3.2
Net*_4: *.4 C300.2 | length 6.7
  Top Layer w0.3: *.4 73.594,116.825 73.99,117.221 76.53,117.221 76.911,116.84 C300.2@76.911,114.839
NetC6_1: C6.1 U1.7 Y1.2 | length 29
  Top Layer w0.2: U1.7 68.223,108.135 70.808,108.135 74.168,104.775 74.168,102.362 75.184,101.346 79.756,101.346 80.899,102.489 Y1.2
  Bottom Layer w0.2: C6.1 80.772,97.282 82.423,98.933 82.423,102.108 Y1.2
NetC7_2: C7.2 U1.8 Y1.1 | length 17.6
  Top Layer w0.2: U1.8 67.541,108.585 70.994,108.585 75.819,103.76 Y1.1
  Bottom Layer w0.2: Y1.1 77.089,103.632 79.254,101.467 C7.2
Netj1_1: j1.1 j2.1 NRF1.8 | length 6.2
  Bottom Layer w0.2: NRF1.8 82.931,122.936 83.693,123.698 j2.1 j1.1
NetLED1_1: LED1.1 R1.1 | length 2.4
  Top Layer w0.3: LED1.1 57.559,125.349 R1.1
NetQ101_1: Q101.1 R101.2 | length 8.8
  Bottom Layer w0.2: R101.2 55.27,130.454 58.326,127.399 60.775,127.399 61.173,127.798 Q101.1
NetQ102_1: Q102.1 R102.2 | length 13.7
  Bottom Layer w0.2: R102.2 56.49,128.397 57.937,126.949 65.888,126.949 66.304,127.366 Q102.1
NetR20_1: R20.1 U2.9 | length 7.6
  Bottom Layer w0.2: v1(40.386,117.918) 40.386,116.586 40.767,116.205 44.704,116.205 45.085,115.824 U2.9
R1: Q102.3 REL_BRD1.3 REL_BRD1.4 | length 15.1
  Top Layer w0.3: REL_BRD1.4 REL_BRD1.3
  Bottom Layer w0.3: Q102.3 65.998,130.59 66.599,131.191 74.676,131.191 76.01,132.525 REL_BRD1.4
R2: Q101.3 REL_BRD1.5 REL_BRD1.6 | length 18.4
  Top Layer w0.3: REL_BRD1.6 REL_BRD1.5
  Bottom Layer w0.3: Q101.3 60.223,131.674 60.503,131.953 73.05,131.953 73.47,132.373 REL_BRD1.6
RELAY1: R102.1 U2.18 | length 5
  Bottom Layer w0.2: U2.18 R102.1@52.705,128.981
RELAY2: R101.1 U2.17 | length 7.5
  Bottom Layer w0.2: U2.17 51.435,129.565 52.324,130.454 R101.1@52.934,130.454
RESET1: PROG1.5 R10.1 SE.4 U1.29 | length 32.6
  Top Layer w0.2: PROG1.5 49.276,98.298 50.025,97.549 ; SE.4 50.178,97.549 50.025,97.549 ; U1.29 70.231,98.991 70.231,97.793 65.783,93.345 54.229,93.345 50.025,97.549
RPWM: LED_BOARD1.7 LED_BOARD1.8 U2.16 | length 12.6
  Bottom Layer w0.2: U2.16 50.165,132.649 LED_BOARD1.7 LED_BOARD1.8
SCK1NRF: NRF1.5 NRF2.5 Q2.2 R4.1 | length 29.3
  Bottom Layer w0.2: Q2.2 63.815,115.636 R4.1 65.405,115.697 68.961,119.253 68.961,123.063 69.723,123.825 75.946,123.825 ; NRF1.5 75.311,122.809 75.311,123.571 75.057,123.825 77.47,123.825 78.847,125.202 78.847,127.107 77.597,128.357 NRF2.5
VCC: *.1 *.3 C1.1 C4.2 C5.2 C8.2 ETH1.1 j2.2 LED_BOARD1.1 LED_BOARD1.2 P1.1 PC1.+ PC3.+ PROG1.2 R3.2 R5.2 R7.2 R9.2 R10.2 R18.2 R19.2 R300.2 REL_BRD1.1 REL_BRD1.2 U1.4 U1.6 U1.18 U2.20 | length 345.2
  Top Layer w0.2: v1(79.756,115.443) v1@79.756,115.57
  Top Layer w0.3: R10.2 56.444,95.504 C5.2 60.325,96.399 60.325,100.237 U1.18 62.831,102.743 63.962,102.743 U1.6 68.854,107.635 69.657,107.635 70.104,107.188 70.104,106.622 U1.4 ; *.1 71.694,114.315 71.882,114.503 73.406,114.503 73.594,114.315 *.3 73.594,110.846 75.27,109.169 C1.1
  Top Layer w0.5: 35.809,100.727 36.968,99.568 v1(41.021,99.568)
  Top Layer w1: R19.2 40.122,130.226 ; v1(55.245,126.619) 55.245,129.032 56.769,130.556 84.582,130.556 86.349,128.789 v1(86.349,120.605) 86.349,114.819 ; v1(76.733,108.306) C1.1@76.733,109.068 ; REL_BRD1.2 REL_BRD1.1 78.55,136.882 77.204,138.228 62.964,138.228 62.306,138.886 59.614,138.886 58.956,138.228 45.584,138.228 LED_BOARD1.2 LED_BOARD1.1 40.122,130.226 ; PC1.+ 83.68,117.488 86.349,114.819 ; v1(84.607,108.915) 86.349,107.174 ; 40.122,130.226 35.941,126.045 35.941,97.663 43.942,89.662 69.977,89.662 v1(74.295,93.98) 75.057,94.742 84.963,94.742 86.349,96.128 86.349,107.174 ; 86.349,107.174 86.349,114.819
  Bottom Layer w0.2: R5.2@59.902,114.356 59.902,113.326 60.325,112.903 66.929,112.903 ; R3.2 66.52,113.312 66.929,112.903 ; R7.2 73.138,113.298 73.533,112.903 ; v1(79.756,115.443) R9.2 79.756,113.538 79.121,112.903 73.533,112.903 ; 66.929,112.903 73.533,112.903
  Bottom Layer w0.3: U2.20 v1(55.245,126.619) ; v1(65.151,104.013) 67.691,104.013 68.74,102.964 68.74,96.92 P1.1 P1.1@68.783,96.444
  Bottom Layer w0.5: v1(41.021,99.568) C8.2 42.412,101.721 42.545,101.854 42.545,103.886 42.799,104.14 PROG1.2
  Bottom Layer w1: ETH1.1 55.499,110.236 57.658,112.395 57.658,125.603 56.642,126.619 v1(55.245,126.619) ; 67.945,92.329 69.374,92.329 71.025,93.98 v1(74.295,93.98) ; v1(76.733,108.306) 76.733,108.585 77.064,108.915 v1(84.607,108.915) ; j2.2 v1(86.349,120.605)
pads on no net: ETH1.3 ETH1.4 ETH1.5 ETH1.10 ETH1.11 ETH1.12 LED_BOARD1.9 LED_BOARD1.10 M1.S M2.S M3.S M4.S M5.S P1.2 P1.3 P1.4 P1.6 P1.7 P1.8 P1.9 P1.MH1 P1.MH2 U1.19 U1.20 U1.22 U2.11

## Polygon pours and split planes (outlines as drawn)
VCC on Top Layer "Bottom Layer-No Net" (hatched 90Degree grid 0.508 track 1, remove dead copper, pour order 4): 34.671,139.827 87.249,139.827 87.249,87.986 87.274,87.96 87.071,87.757 34.671,87.757
GND on Bottom Layer "Bottom Layer-No Net" (hatched 90Degree grid 0.508 track 1, remove dead copper, pour order 6): 34.773,139.827 87.046,139.827 87.122,139.751 87.122,87.96 34.747,87.96 34.671,88.036

## Keep-outs
Keep-Out Layer:
  the board outline again, w0.3

## Other copper
Top Layer:
  rectangle net VCC: 44.018,131.343 45.974,132.309
  rectangle net VCC: 47.625,127.229 48.184,129.108
  rectangle net VCC: 82.499,117.673 83.82,118.161
  rectangle net VCC: 79.756,115.443 84.76,117.373
  rectangle net VCC: 77.978,115.418 81.839,119.177
  rectangle net VCC: 53.848,123.952 55.931,129.298
  rectangle net VCC: 73.711,109.703 75.717,112.852
  rectangle net VCC: 74.78,108.306 77.851,110.211
  rectangle net VCC: 42.139,88.417 49.581,89.992
  rectangle net VCC: 85.598,119.253 86.741,121.031
  rectangle net VCC: 35.921,103.837 35.941,105.664
  rectangle net VCC: 56.515,129.794 73.025,130.937
  text "yoosofpiran@gmail.com" at 56.871,128.245 h0.7
  text "ver3" at 61.595,126.111 h0.7
Bottom Layer:
  rectangle net VCC: 70.104,93.472 70.358,95.123
  rectangle net VCC: 70.358,93.98 72.009,94.996
  rectangle net VCC: 68.453,92.583 70.104,93.472
  rectangle net VCC: 64.77,92.583 67.056,93.472
  rectangle net VCC: 64.77,89.916 70.104,92.583
  rectangle net VCC: 66.294,92.075 68.58,95.25
  rectangle net GND: 81.85,127.889 83.566,130.051
  rectangle net GND: 65.278,123.063 66.167,123.571
  rectangle net GND: 55.372,136.525 56.388,138.176
  rectangle net GND: 56.2,136.144 57.277,137.922
  rectangle net GND: 49.53,112.236 52.213,113.03
  rectangle net VCC: 68.58,94.996 70.358,95.758
  rectangle net VCC: 68.783,94.996 69.469,99.314
  rectangle net GND: 64.135,95.377 65.786,99.441
  rectangle net GND: 60.96,98.552 65.786,101.981
  rectangle net GND: 74.888,100.548 77.724,101.854
  rectangle net GND: 37.338,124.204 40.132,131.064
  rectangle net GND: 49.149,103.124 50.165,104.521
  rectangle net GND: 50.165,103.124 51.054,103.886
  rectangle net GND: 63.881,132.867 67.056,138.049
  rectangle net GND: 54.864,132.867 57.785,137.922

## Silkscreen, mask and mechanical layers (free items; w line width, h text height)
Drill Drawing:
  text ".LEGEND" at 105.88,81.28 h0.7
  text "Drill Drawing." at 105.88,78.74 h0.7

## Dimensions
34.671,87.757 to 34.671,139.827 on Mechanical 1
34.671,87.376 to 87.249,87.376 on Mechanical 1

## Text inside footprints (layer, text, board x,y; h text height)
P1: Mechanical 1 "PCB Edge" at 71.219,88.595 h0.25
PROG1: Top Overlay "1" at 42.164,101.092 h1.27; Top Overlay "2" at 41.656,103.632 h1.27
REL_BRD1: Top Overlay "1" at 62.802,136.652 h1.27 r180